# Altium PCB PA_Channel.PcbDoc
Units mm, origin at the board's own origin, x right, y up, seen from the top; angles counter-clockwise.
Board outline 159.5 x 29.5 mm, 2 copper layers (Top Layer, Bottom Layer), stack 1.571 mm thick; 2 components, 0 nets, 24 pads, 0 vias.
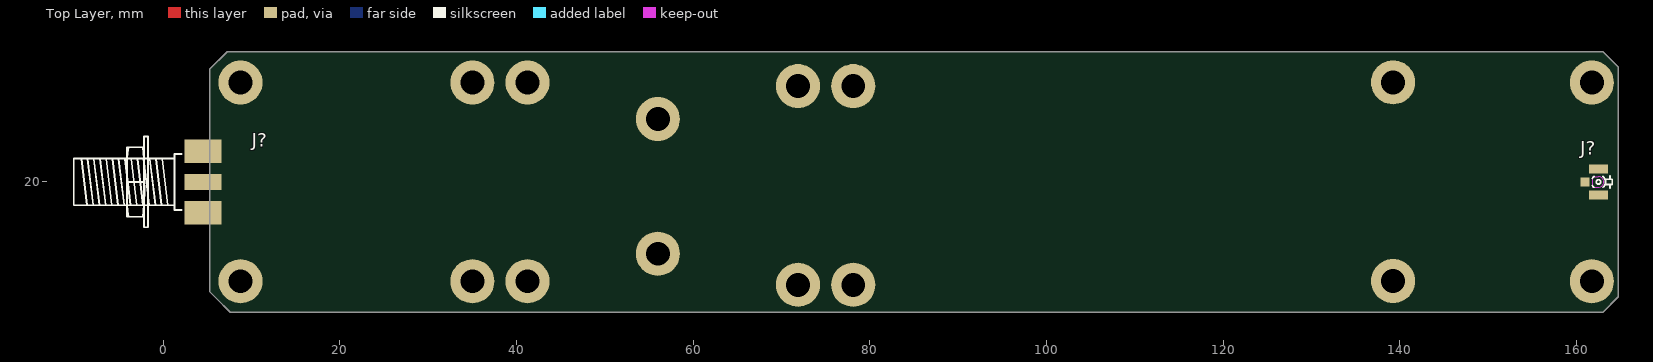
[diagram p0: Top Layer view]
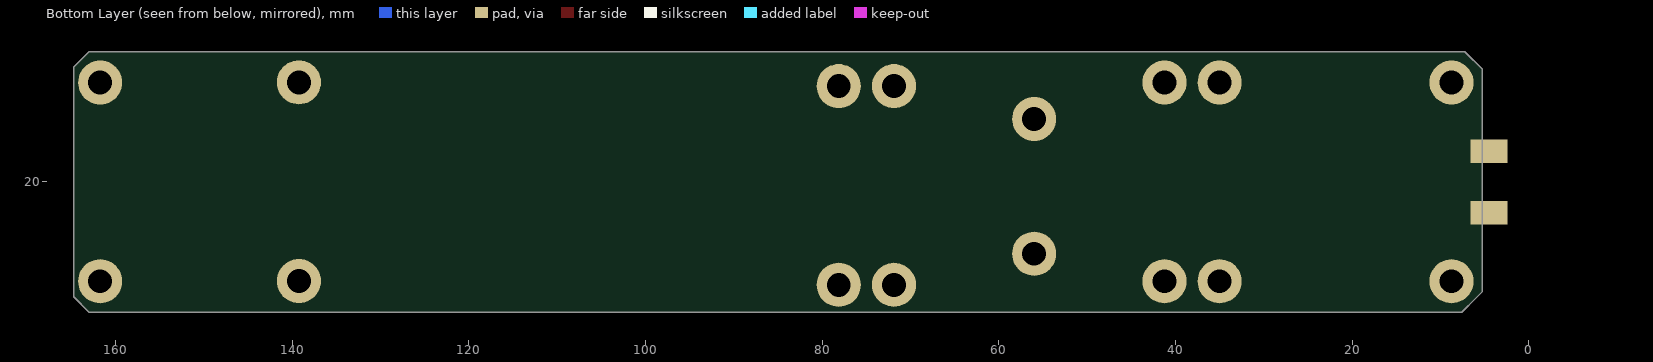
[diagram p1: Bottom Layer view, seen from below]

## Layer stack, top to bottom
Top Solder: solder mask 0.0102, Solder Resist, Dk 3.5
Top Layer: signal copper 0.0356
Dielectric 1: dielectric 1.5, FR-4, Dk 4.8
Bottom Layer: signal copper 0.0356
Bottom Solder: solder mask 0.0102, Solder Resist, Dk 3.5

## Board outline
5.989,6.851 5.25,7.59 5.25,32.75 7.25,34.75 163,34.75 164.75,33 164.75,7 163,5.25 7.59,5.25

## Design rules (kind name [scope] priority, off if disabled: settings)
Clearance [All] p1: gap=0.254
PolygonConnect [All] p1: connectstyle=Relief reliefconductorwidth=0.254 reliefentries=4 polygonreliefangle="90 Angle" airgapwidth=0.254
RoomDefinition PA_Channel [InComponentClass('PA_Channel')] p1: confinementstyle=ConfineIn formatcopy=TRUE lockcomponents=FALSE outline 165.989,6.85 182.739,6.85 182.739,28.35 165.989,28.35
RoutingVias [All] p1: holewidth=0.711 width=1.27 viastyle="Through Hole" minholewidth=0.711 minwidth=1.27 maxholewidth=0.711 maxwidth=1.27
SolderMaskExpansion [All] p1: expansion=0.102
Width [All] p1: maxlimit=0.254 minlimit=0.254 preferedwidth=0.254
30 further rules are at their usual default settings.

## Classes and differential pairs
component class PA_Channel: J?

## Components (designator, comment, footprint, x,y, rotation, side; value= is the part's Value field where it differs from the comment)
J? "U.FL" HIROSE_U.FL-R-SMT-1(10) 162.5,20 r270 top
J? "SMA" MOLEX_73251-2121 4.5,20 r0 top

## Footprints (in the part's own frame and the unit in brackets; to place one, negate y for a bottom-side part, rotate by r counter-clockwise, add the part's x,y. Pads: shape width x height; smd on the part's side, far side on the other; paste and mask are expansions set on the pad)
HIROSE_U.FL-R-SMT-1(10) [mm] "Up to 6GHz Ultra Small Surface Mount Male Coaxial Connectors U.FL Series"
  rect 1x1.05 smd: 1(0,-1.525)
  rect 1.05x2.2 smd: 2(-1.475,0) 2(1.475,0)
  Top Layer keep-out lines w0.1: 0.6,-0.65 -0.6,-0.65 -0.6,0 cw(c0,0) 0.6,0 0.6,-0.65
  silkscreen extent -0.7,-0.69 0.7,1.55, body extent -1.5,-1.55 1.5,1.55, height 1.25
MOLEX_73251-2121 [mm] "50 Ohm, SMA Edge Mount PCB, With Jam Nut And Lock Washer"
  rect 4.19x1.78 smd: 1(0,0)
  rect 4.19x2.665 smd: 2(0,-3.492) 2(0,3.492)
  rect 4.19x2.665 smd far side: 2(0,-3.492) 2(0,3.492)
  silkscreen extent -14.64,-5.13 -2.44,5.13, body extent -14.64,-5.13 1.62,5.13, height 5.76

## Part data
J?: library part HIROSE_U.FL-R-SMT-1(10)
J?: library part MOLEX_73251-2121

## Free pads (board coordinates)
  round 5 hole 2.7 unplated: 0(8.75,31.25) 1(8.75,8.75) 2(41.25,8.75) 3(35,8.75) 4(35,31.25) 5(41.25,31.25) 6(56,27.125) 7(56,11.875) 8(71.875,30.85) 9(78.125,30.85) 10(71.875,8.35) 11(78.125,8.35) 12(139.25,31.275) 13(139.25,8.775) 14(161.75,31.25) 15(161.75,8.75)

## Nets (pads, with @x,y where several pads share a name; then routed paths per layer and width w, separated by ;. In a path a pad name is that pad's centre, name@x,y a point inside that pad or via, vN(x,y) a via of type N, cw(c..) or ccw(c..) an arc to the next point about the centre after c; other vN are vias at no path point)
pads on no net: J?.1 J?.2

## Silkscreen, mask and mechanical layers (free items; w line width, h text height)
Mechanical 1:
  the board outline again, w0.1
Mechanical 3:
  drawing of 1662 lines, arcs and shapes, not listed
  text "OBUDOWA" at -4.556,-43.649 h4.11
  text "A" at -2.467,-63.34 h3.08
  text "A" at 221.533,-63.34 h3.08
  text "40" at 206.083,-68.74 h3.08 r90
  text "200" at 98.533,-96.29 h3.08
  text "27" at 240.033,-96.59 h3.08
  text "A - A" at -6.467,-104.19 h3.08
  text "PRZYKRYWKA" at -5.056,-141.649 h4.11
  text "B" at -0.717,-148.94 h3.08
  text "B" at 210.533,-148.94 h3.08
  text "3" at 207.083,-192.94 h3.08 r90
  text "6" at -13.917,-194.19 h3.08 r90
  text "Scale" at 190.053,-212.309 h2.12
  text "1 : 1" at 192.386,-217.351 h2.12
  text "Obudowa & Przykrywka v1" at 224.594,-219.841 h3.18
  text "TITLE" at 213.453,-221.877 h2.12
  text "Name" at 188.675,-222.309 h2.12
  text "Date" at 167.453,-222.328 h2.12
  text "Rev." at 164.74,-222.371 h2.12
  text "1.0" at 164.053,-227.309 h2.12
  text "Tomek" at 192.444,-231.249 h2.12
  text "DWG.No." at 203.053,-231.899 h2.12
  text "Design by" at 163.953,-232.36 h2.12
  text "March 22, 2016" at 189.653,-237.309 h2.12
  text "Date" at 164.421,-237.328 h2.12